# Altium PCB AVR PCB.PcbDoc
Units mm, origin at the board's own origin, x right, y up, seen from the top; angles counter-clockwise.
Board outline 58.56 x 64.69 mm, 2 copper layers (F.Cu, B.Cu); 14 components, 26 nets, 73 pads, 0 vias.
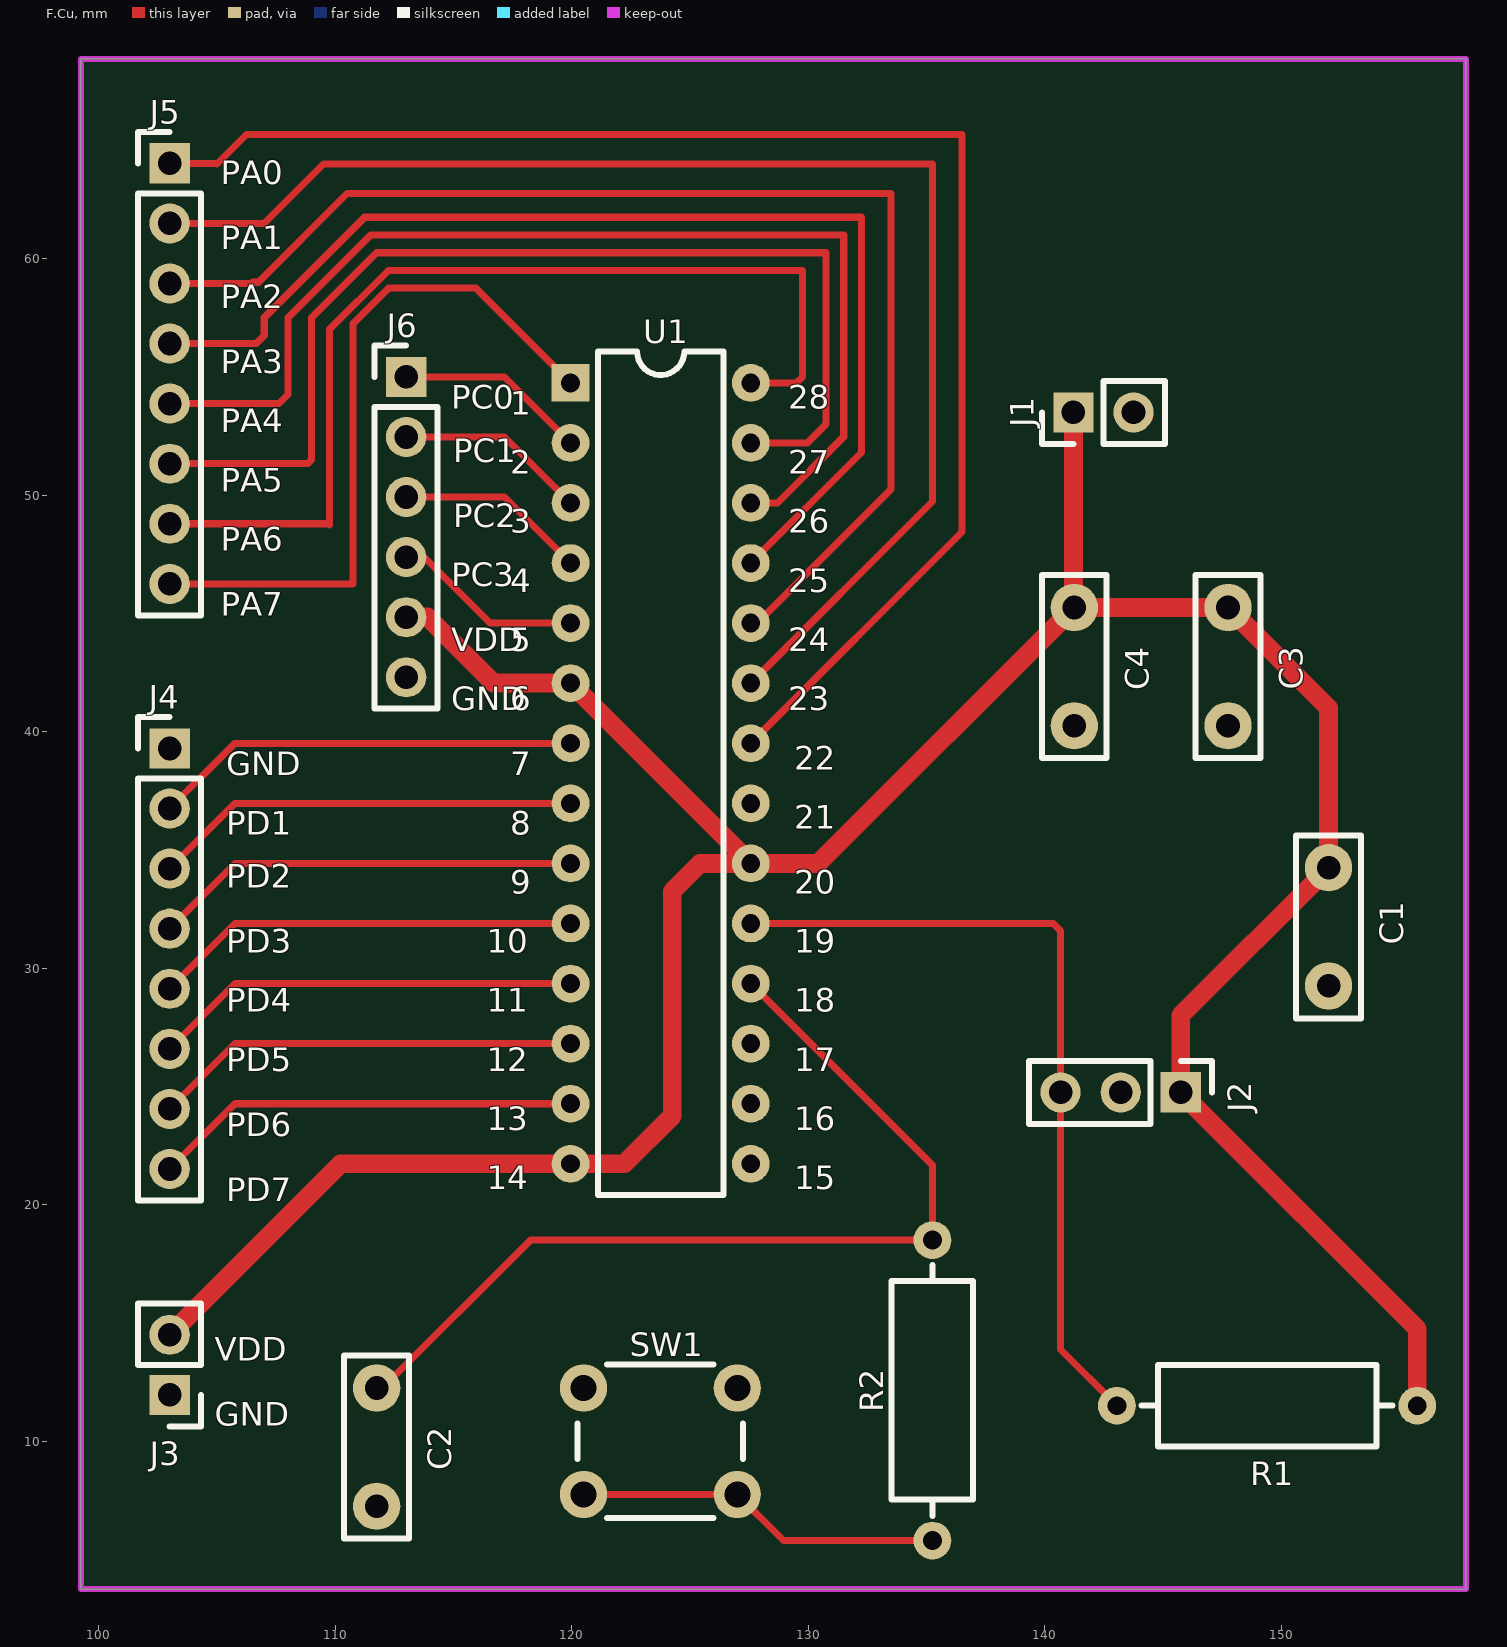
[diagram p0: F.Cu view]
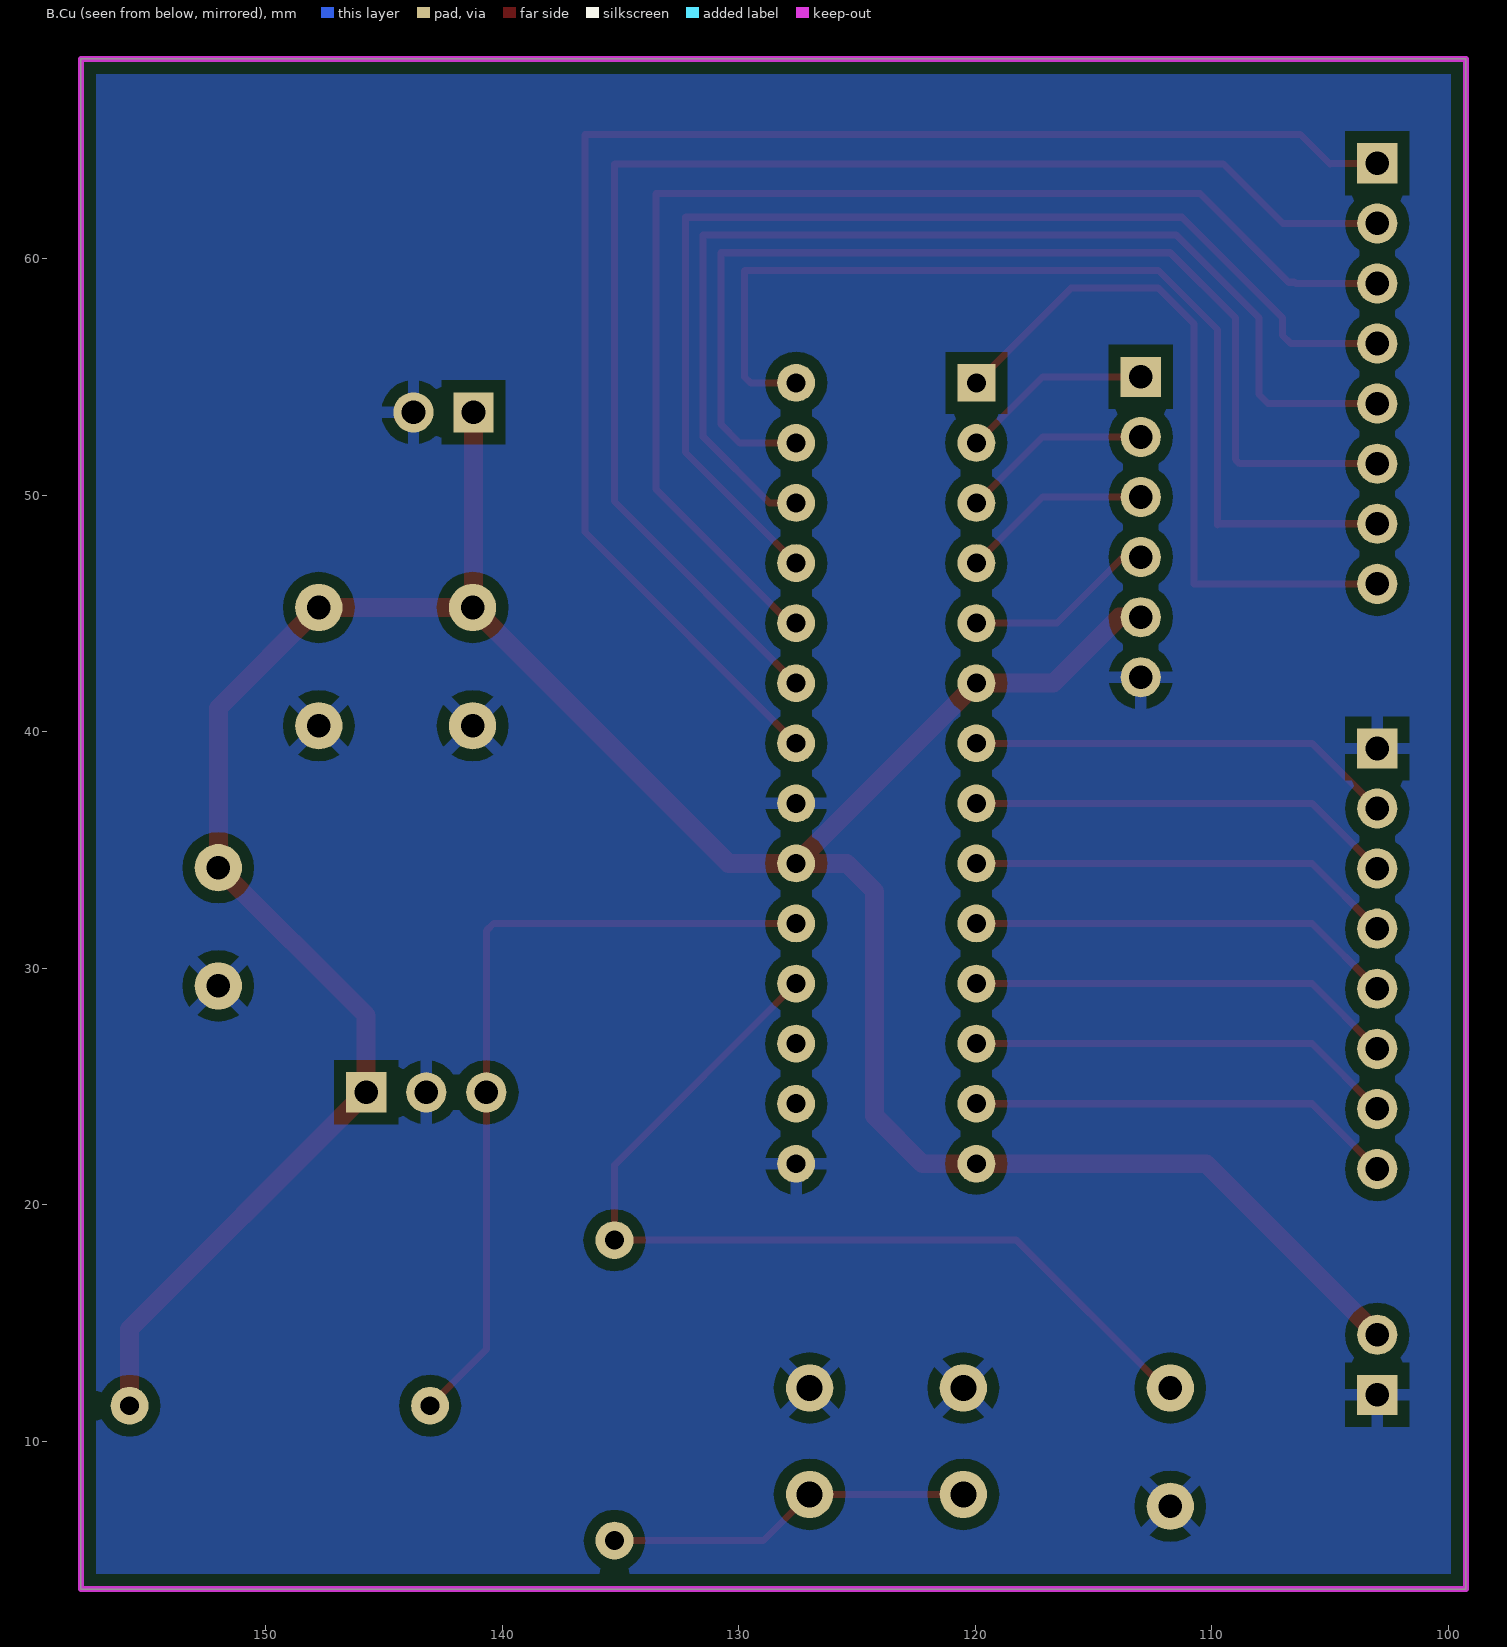
[diagram p1: B.Cu view, seen from below]

## Layer stack, top to bottom
F.Mask: solder mask 0.0102, Solder Resist, Dk 3.5
F.Cu: signal copper 0.0356
Dielectric 1: dielectric 0.32, FR-4, Dk 4.8
B.Cu: signal copper 0.0356
B.Mask: solder mask 0.0102, Solder Resist, Dk 3.5

## Board outline
99.25,68.442 99.25,3.75 157.808,3.75 157.808,68.442 99.25,68.442

## Design rules (kind name [scope] priority, off if disabled: settings)
Clearance "Clearence 0.5_Polygon" [InNamedPolygon('B.Cu-GND')] p1: gap=0.5 ignorepadtopadclearanceinfootprint=FALSE
MinimumSolderMaskSliver [All] p1: minsoldermaskwidth=0
PolygonConnect Polygon_B.Cu-GND_ConnectDirect [IsNamedPolygon('B.Cu-GND') vs IsVia] p1: connectstyle=Direct reliefconductorwidth=0.254 reliefentries=4 polygonreliefangle="90 Angle" airgapwidth=0.254
PolygonConnect Polygon_B.Cu-GND_ConnectRelief45 [IsNamedPolygon('B.Cu-GND') vs (IsThruPin or IsSMTPin) and (PadShape_AllLayers = 'Round')] p2: connectstyle=Relief reliefconductorwidth=0.5 reliefentries=4 polygonreliefangle="45 Angle" airgapwidth=0.5
PolygonConnect Polygon_B.Cu-GND_ConnectRelief90 [IsNamedPolygon('B.Cu-GND') vs (IsThruPin or IsSMTPin) and (PadShape_AllLayers <> 'Round')] p3: connectstyle=Relief reliefconductorwidth=0.5 reliefentries=4 polygonreliefangle="90 Angle" airgapwidth=0.5
RoutingVias [All] p1: holewidth=0.711 width=1.27 viastyle="Through Hole" minholewidth=0.711 minwidth=1.27 maxholewidth=0.711 maxwidth=1.27
SilkToSilkClearance [All] p1: silktosilkclearance=0
SilkToSolderMaskClearance [IsPad] p1: minsilkscreentomaskgap=0 clearancetoexposedcopper=TRUE
SolderMaskExpansion [All] p1: expansion=0.102 istentingtop=FALSE
Width [All] p1: maxlimit=1 minlimit=0.254 preferedwidth=0.254
27 further rules are at their usual default settings.

## Components (designator, comment, footprint, x,y, rotation, side; value= is the part's Value field where it differs from the comment)
C1 "Comment" C_Disc_D7.5mm_W2.5mm_P5.00mm 152,34.25 r270 top value=1u
C2 "Comment" C_Disc_D7.5mm_W2.5mm_P5.00mm 111.75,12.25 r270 top value=1u
C3 "Comment" C_Disc_D7.5mm_W2.5mm_P5.00mm 147.75,45.25 r270 top value=1u
C4 "Comment" C_Disc_D7.5mm_W2.5mm_P5.00mm 141.25,45.25 r270 top value=1n
J1 "Comment" PinHeader_1x02_P2.54mm_Vertical 141.21,53.5 r90 top value=Conn_01x02_Pin
J2 "Comment" PinHeader_1x03_P2.54mm_Vertical 145.75,24.75 r270 top value=Conn_01x03_Male
J3 "Comment" PinHeader_1x02_P2.54mm_Vertical 103,11.96 r180 top value=Conn_01x02_Male
J4 "Comment" PinHeader_1x08_P2.54mm_Vertical 103,39.29 r0 top value=Conn_01x08_Male
J5 "Comment" PinHeader_1x08_P2.54mm_Vertical 103,64.03 r0 top value=Conn_01x08_Male
J6 "Comment" PinHeader_1x06_P2.54mm_Vertical 113,55 r0 top value=Conn_01x06_Male
R1 "Comment" R_Axial_DIN0309_L9.0mm_D3.2mm_P12.70mm_Horizontal 155.75,11.5 r180 top value=1.2k
R2 "Comment" R_Axial_DIN0309_L9.0mm_D3.2mm_P12.70mm_Horizontal 135.25,5.8 r90 top value=330
SW1 "Comment" SW_PUSH_6mm 120.5,12.25 r0 top value=SW_SPST
U1 "Comment" DIP-28_W7.62mm 119.95,54.75 r0 top value=AVR128DB28x-xSP

## Footprints (in the part's own frame and the unit in brackets; to place one, negate y for a bottom-side part, rotate by r counter-clockwise, add the part's x,y. Pads: shape width x height; smd on the part's side, far side on the other; paste and mask are expansions set on the pad)
C_Disc_D7.5mm_W2.5mm_P5.00mm [mm]
  round 2 hole 1 paste-2539.97 mask+0: 1(0,0) 2(5,0)
  silkscreen extent -1.37,-1.37 6.37,1.37
DIP-28_W7.62mm [mm]
  rect 1.6x1.6 hole 0.8 paste-2539.97 mask+0: 1(0,0)
  rrect100% 1.6x1.6 hole 0.8 paste-2539.97 mask+0: 2(0,-2.54) 3(0,-5.08) 4(0,-7.62) 5(0,-10.16) 6(0,-12.7) 7(0,-15.24) 8(0,-17.78) 9(0,-20.32) 10(0,-22.86) 11(0,-25.4) 12(0,-27.94) 13(0,-30.48) 14(0,-33.02) 15(7.62,-33.02) 16(7.62,-30.48) 17(7.62,-27.94) 18(7.62,-25.4) 19(7.62,-22.86) 20(7.62,-20.32) 21(7.62,-17.78) 22(7.62,-15.24) 23(7.62,-12.7) 24(7.62,-10.16) 25(7.62,-7.62) 26(7.62,-5.08) 27(7.62,-2.54) 28(7.62,0)
  silkscreen extent 1.16,-34.35 6.46,1.33
PinHeader_1x02_P2.54mm_Vertical [mm]
  rect 1.7x1.7 hole 1 paste-2539.97 mask+0: 1(0,0)
  rrect100% 1.7x1.7 hole 1 paste-2539.97 mask+0: 2(0,-2.54)
  silkscreen extent -1.33,-3.87 1.33,1.33
PinHeader_1x03_P2.54mm_Vertical [mm]
  rect 1.7x1.7 hole 1 paste-2539.97 mask+0: 1(0,0)
  rrect100% 1.7x1.7 hole 1 paste-2539.97 mask+0: 2(0,-2.54) 3(0,-5.08)
  silkscreen extent -1.33,-6.41 1.33,1.33
PinHeader_1x06_P2.54mm_Vertical [mm]
  rect 1.7x1.7 hole 1 paste-2539.97 mask+0: 1(0,0)
  rrect100% 1.7x1.7 hole 1 paste-2539.97 mask+0: 2(0,-2.54) 3(0,-5.08) 4(0,-7.62) 5(0,-10.16) 6(0,-12.7)
  silkscreen extent -1.33,-14.03 1.33,1.33
PinHeader_1x08_P2.54mm_Vertical [mm]
  rect 1.7x1.7 hole 1 paste-2539.97 mask+0: 1(0,0)
  rrect100% 1.7x1.7 hole 1 paste-2539.97 mask+0: 2(0,-2.54) 3(0,-5.08) 4(0,-7.62) 5(0,-10.16) 6(0,-12.7) 7(0,-15.24) 8(0,-17.78)
  silkscreen extent -1.33,-19.11 1.33,1.33
R_Axial_DIN0309_L9.0mm_D3.2mm_P12.70mm_Horizontal [mm]
  round 1.6 hole 0.8 paste-2539.97 mask+0: 1(0,0)
  rrect100% 1.6x1.6 hole 0.8 paste-2539.97 mask+0: 2(12.7,0)
  silkscreen extent 1.04,-1.72 11.66,1.72
SW_PUSH_6mm [mm]
  round 2 hole 1.1 paste-2539.97 mask+0: 1(0,0) 1(6.5,0) 2(0,-4.5) 2(6.5,-4.5)
  silkscreen extent -0.25,-5.5 6.75,1

## Part data
C1 C2 C3 C4: library part C_Disc_D7.5mm_W2.5mm_P5.00mm, "C, Disc series, Radial, pin pitch=5.00mm, , diameter*width=7.5*2.5mm^2, Capacitor, http://www.vishay.com/docs/28535/vy2series.pdf", Footprint=Capacitor_THT:C_Disc_D7.5mm_W2.5mm_P5.00mm, ki_fp_filters=C_*
J1 J3: library part PinHeader_1x02_P2.54mm_Vertical, "Through hole straight pin header, 1x02, 2.54mm pitch, single row", Footprint=Connector_PinHeader_2.54mm:PinHeader_1x02_P2.54mm_Vertical, ki_fp_filters=Connector*:*_1x??_*
  J1: Description="Generic connector, single row, 01x02, script generated"
J2: library part PinHeader_1x03_P2.54mm_Vertical, "Through hole straight pin header, 1x03, 2.54mm pitch, single row", Footprint=Connector_PinHeader_2.54mm:PinHeader_1x03_P2.54mm_Vertical, ki_fp_filters=Connector*:*_1x??_*
J4 J5: library part PinHeader_1x08_P2.54mm_Vertical, "Through hole straight pin header, 1x08, 2.54mm pitch, single row", Footprint=Connector_PinHeader_2.54mm:PinHeader_1x08_P2.54mm_Vertical, ki_fp_filters=Connector*:*_1x??_*
J6: library part PinHeader_1x06_P2.54mm_Vertical, "Through hole straight pin header, 1x06, 2.54mm pitch, single row", Footprint=Connector_PinHeader_2.54mm:PinHeader_1x06_P2.54mm_Vertical, ki_fp_filters=Connector*:*_1x??_*
R1 R2: library part R_Axial_DIN0309_L9.0mm_D3.2mm_P12.70mm_Horizontal, "Resistor, Axial_DIN0309 series, Axial, Horizontal, pin pitch=12.7mm, 0.5W = 1/2W, length*diameter=9*3.2mm^2, http://cdn-reichelt.de/documents/datenblatt/B400/1_4W%23YAG.pdf", Footprint=Resistor_THT:R_Axial_DIN0309_L9.0mm_D3.2mm_P12.70mm_Horizontal, ki_fp_filters=R_*
SW1: library part SW_PUSH_6mm, "Generic 6mm SW tactile push button", Footprint=Button_Switch_THT:SW_PUSH_6mm
U1: library part DIP-28_W7.62mm, "28-lead though-hole mounted DIP package, row spacing 7.62 mm (300 mils)", Footprint=Package_DIP:DIP-28_W7.62mm, Datasheet=https://ww1.microchip.com/downloads/en/DeviceDoc/AVR128DB28-32-48-64-DataSheet-DS40002247A.pdf, ki_fp_filters=DIP*W7.62mm*

## Nets (pads, with @x,y where several pads share a name; then routed paths per layer and width w, separated by ;. In a path a pad name is that pad's centre, name@x,y a point inside that pad or via, vN(x,y) a via of type N, cw(c..) or ccw(c..) an arc to the next point about the centre after c; other vN are vias at no path point)
GND: C1.2 C2.2 C3.2 C4.2 J1.2 J2.2 J3.1 J4.1 J6.6 SW1.1 U1.15 U1.21 | length 0.3
  F.Cu w0.2: J1.2@144.475,53.225 J1.2@144.475,53.5
Net-(SW1-B): R2.1 SW1.2 | length 15.6
  F.Cu w0.3: SW1.2@120.5,7.75 127,7.75 128.95,5.8 R2.1
PA0: J5.1 U1.22 | length 63.5
  F.Cu w0.3: J5.1 104.97,64.03 105,64 106.25,65.25 136.5,65.25 136.5,48.44 U1.22
PA1: J5.2 U1.23 | length 58.4
  F.Cu w0.3: J5.2 106.99,61.49 109.5,64 135.25,64 135.25,49.73 U1.23
PA2: J5.3 U1.24 | length 52.9
  F.Cu w0.3: J5.3 106.45,58.95 106.5,59 106.75,59 110.5,62.75 133.5,62.75 133.5,50.25 127.75,44.5 127.66,44.59 U1.24
PA3: J5.4 U1.25 | length 48.5
  F.Cu w0.3: J5.4 106.66,56.41 107,56.75 107,57.5 111.25,61.75 132.25,61.75 132.25,51.81 U1.25
PA4: J5.5 U1.26 | length 47
  F.Cu w0.3: J5.5 107.62,53.87 108,54.25 108,57.5 111.5,61 131.5,61 131.5,52.469 128.701,49.67 U1.26
PA5: J5.6 U1.27 | length 45.7
  F.Cu w0.3: J5.6 108.83,51.33 109,51.5 109,57.5 111.75,60.25 130.75,60.25 130.75,53 129.96,52.21 U1.27
PA6: J5.7 U1.28 | length 42.8
  F.Cu w0.3: J5.7 109.71,48.79 109.75,48.75 109.75,57 112.25,59.5 129.75,59.5 129.75,55 129.5,54.75 U1.28
PA7: J5.8 U1.1 | length 30.2
  F.Cu w0.3: J5.8 110.75,46.25 110.75,57.25 112.25,58.75 115.95,58.75 U1.1
PC0: J6.1 U1.2 | length 8.1
  F.Cu w0.3: J6.1 117.16,55 U1.2
PC1: J6.2 U1.3 | length 8.1
  F.Cu w0.3: J6.2 117.16,52.46 U1.3
PC2: J6.3 U1.4 | length 8.1
  F.Cu w0.3: J6.3 117.16,49.92 U1.4
PC3: J6.4 U1.5 | length 8.1
  F.Cu w0.3: J6.4 113.75,47.38 116.54,44.59 U1.5
PD1: J4.2 U1.7 | length 18.1
  F.Cu w0.3: J4.2 105.75,39.5 119.5,39.5 119.51,39.51 U1.7
PD2: J4.3 U1.8 | length 18.1
  F.Cu w0.3: J4.3 105.76,36.97 U1.8
PD3: J4.4 U1.9 | length 18.1
  F.Cu w0.3: J4.4 105.76,34.43 U1.9
PD4: J4.5 U1.10 | length 18.1
  F.Cu w0.3: J4.5 105.76,31.89 U1.10
PD5: J4.6 U1.11 | length 18.1
  F.Cu w0.3: J4.6 105.76,29.35 U1.11
PD6: J4.7 U1.12 | length 18.1
  F.Cu w0.3: J4.7 105.76,26.81 U1.12
PD7: J4.8 U1.13 | length 18.1
  F.Cu w0.3: J4.8 105.76,24.27 U1.13
unconnected-(U1-XTAL32K1{slash}PF0-Pad16): U1.16
unconnected-(U1-XTAL32K2{slash}PF1-Pad17): U1.17
UPDI: J2.3 R1.2 U1.19 | length 34.3
  F.Cu w0.3: U1.19 140.36,31.89 140.67,31.58 J2.3 140.67,13.88 R1.2
VDD: C1.1 C3.1 C4.1 J1.1 J2.1 J3.2 J6.5 R1.1 U1.6 U1.14 U1.20 | length 132.7
  F.Cu w0.8: J3.2 110.23,21.73 U1.14 122.23,21.73 124.25,23.75 124.25,33.25 125.43,34.43 U1.20 ; J6.5 113.91,44.84 116.7,42.05 U1.6 U1.20 ; J1.1@141.25,53.25 141.21,53.29 J1.1 141.21,45.29 C4.1 ; R1.1 155.75,14.75 146.2,24.3 J2.1 145.75,28 C1.1 152,41 C3.1 C4.1 ; U1.20 130.43,34.43 C4.1
{slash}RESET: C2.1 R2.2 U1.18 | length 40.1
  F.Cu w0.3: C2.1 112,12.25 118.25,18.5 R2.2 135.25,21.67 U1.18

## Polygon pours and split planes (outlines as drawn)
GND on B.Cu "B.Cu-GND" (solid, remove dead copper, pour order 0): 96.5,69.75 96.5,0 157.75,0 162.5,4.75 162.5,69 156.75,74.75 101.5,74.75 96.25,69.5

## Keep-outs
Edge.Cuts:
  lines w0: 99.25,3.75 157.808,3.75 157.808,68.442 99.25,68.442 99.25,3.75
  lines w0.254: 99.25,3.75 157.808,3.75 157.808,68.442 99.25,68.442 99.25,3.75

## Silkscreen, mask and mechanical layers (free items; w line width, h text height)
F.SilkS:
  text "PA0" at 105.15,63.15 h1
  text "PA1" at 105.15,60.4 h1
  text "PA2" at 105.15,57.9 h1
  text "PA3" at 105.15,55.15 h1
  text "PC0" at 114.9,53.65 h1
  text "28" at 129.15,53.65 h1
  text "1" at 117.4,53.4 h1
  text "PA4" at 105.15,52.65 h1
  text "PC1" at 115,51.4 h1
  text "2" at 117.4,50.9 h1
  text "27" at 129.15,50.9 h1
  text "PA5" at 105.15,50.15 h1
  text "PC2" at 115,48.65 h1
  text "3" at 117.4,48.4 h1
  text "26" at 129.15,48.4 h1
  text "PA6" at 105.15,47.65 h1
  text "PC3" at 114.9,46.15 h1
  text "4" at 117.4,45.9 h1
  text "25" at 129.15,45.9 h1
  text "PA7" at 105.15,44.9 h1
  text "VDD" at 114.9,43.4 h1
  text "5" at 117.4,43.4 h1
  text "24" at 129.15,43.4 h1
  text "GND" at 114.9,40.9 h1
  text "6" at 117.4,40.9 h1
  text "23" at 129.15,40.9 h1
  text "22" at 129.4,38.4 h1
  text "GND" at 105.4,38.15 h1
  text "7" at 117.4,38.15 h1
  text "21" at 129.4,35.9 h1
  text "PD1" at 105.4,35.65 h1
  text "8" at 117.4,35.65 h1
  text "PD2" at 105.4,33.4 h1
  text "9" at 117.4,33.15 h1
  text "20" at 129.4,33.15 h1
  text "PD3" at 105.4,30.65 h1
  text "10" at 116.4,30.65 h1
  text "19" at 129.4,30.65 h1
  text "PD4" at 105.4,28.15 h1
  text "11" at 116.4,28.15 h1
  text "18" at 129.4,28.15 h1
  text "PD5" at 105.4,25.65 h1
  text "12" at 116.4,25.65 h1
  text "17" at 129.4,25.65 h1
  text "13" at 116.4,23.15 h1
  text "16" at 129.4,23.15 h1
  text "PD6" at 105.4,22.9 h1
  text "14" at 116.4,20.65 h1
  text "15" at 129.4,20.65 h1
  text "PD7" at 105.4,20.15 h1
  text "VDD" at 104.9,13.4 h1
  text "GND" at 104.9,10.65 h1